# EAGLE board leakio (EAGLE 9.6.2)

Size 160 x 100 mm. Coordinates in mm from the lower left corner, seen from the top.
Outline: 0,0 160,0 160,100 0,100 0,0
Copper layers (1*16): Top 0.035mm / dielectric 1.5mm / Bottom 0.035mm
Design rules "default": minimum track width 6mil, minimum drill 0.35mm, track to track 6mil, track to pad 6mil, pad to pad 6mil, via to via 6mil, smd to smd 6mil, copper to edge 40mil, drill to drill 6mil, minimum pad ring 10mil, minimum via ring 8mil, stop-mask expansion 4mil, vias tented up to drill 0mil, thermal gap 10mil

## Footprints (pad centres in the part's own frame; a part is rotated, then mirrored left to right if it is on the bottom)
0402 = smd 0.85 x 0.9: 1 -0.58,0; 2 0.58,0
0603 = smd 1.1 x 1: 1 -0.85,0; 2 0.85,0
JST-PH-2-SMT-RA = smd 1 x 4.6: 1 1,-3.7; 2 -1,-3.7 | smd 1.6 x 3.4: NC1 -3.4,1.5; NC2 3.4,1.5
JST-PH-2-SMT = smd 1 x 5.5: 1 -1,-1.8; 2 1,-1.8 | smd 1.6 x 3.4: NC1 -3.4,0; NC2 3.4,0
SOT23-5L = smd 0.55 x 1.2: 1 -0.95,-1.3; 2 0,-1.3; 3 0.95,-1.3; 4 0.95,1.3; 5 -0.95,1.3
USB-C-PTH = smd 1 x 0.3: A1 0.81,2.75; A2 0.81,2.25; A3 0.81,1.75; A4 0.81,1.25; A5 0.81,0.75; A6 0.81,0.25; A7 0.81,-0.25; A8 0.81,-0.75; A9 0.81,-1.25; A10 0.81,-1.75; A11 0.81,-2.25; A12 0.81,-2.75 | drill 0.4 pad 0.65: B1 -0.65,-2.8; B2 -1.35,-2.4; B3 -1.35,-1.6; B4 -0.65,-1.2; B5 -1.35,-0.8; B6 -0.65,-0.4; B7 -0.65,0.4; B8 -1.35,0.8; B9 -0.65,1.2; B10 -1.35,1.6; B11 -1.35,2.4; B12 -0.65,2.8 | drill 0.5 pad 0.8 long: P$13 -1.25,4.13; P$14 -1.25,-4.13; P$15 -7.2,4.13; P$16 -7.2,-4.13 | hole 0.65: 0,3.6
SMARTLED-TTW = smd 0.8 x 0.5: A 0,-0.875; C 0,0.875 | smd 0.35 x 0.35: A@1 0,-0.5; C@1 0,0.5
ESP32-WROOM = smd 3 x 0.9: 3V3 0,16.74; EN 0,15.47; GND1 0,18.01; GND3 18,18.01; IO0 18,1.5; IO4 18,2.77; IO5 18,6.58; IO12 0,1.5; IO14 0,2.77; IO16 18,4.04; IO17 18,5.31; IO18 18,7.85; IO19 18,9.12; IO21 18,11.66; IO22 18,15.47; IO23 18,16.74; IO25 0,6.58; IO26 0,5.31; IO27 0,4.04; IO32 0,9.12; IO33 0,7.85; IO34 0,11.66; IO35 0,10.39; NC 18,10.39; RX 18,12.93; SENSOR_VN 0,12.93; SENSOR_VP 0,14.2; TX 18,14.2 | smd 0.9 x 3: CLK 9.635,0; CMD 8.365,0; GND2 3.285,0; IO2 14.715,0; IO13 4.555,0; IO15 13.445,0; SD0 10.905,0; SD1 12.175,0; SD2 5.825,0; SD3 7.095,0 | smd 5 x 5: GND4 8,10.5 | smd 5 x 5 bottom: GND5 8,10.5
TDFN14_3X3MM = smd 0.7 x 0.2: P$1 -1.475,1.2; P$2 -1.475,0.8; P$3 -1.475,0.4; P$4 -1.475,0; P$5 -1.475,-0.4; P$6 -1.475,-0.8; P$7 -1.475,-1.2; P$8 1.475,-1.2; P$9 1.475,-0.8; P$10 1.475,-0.4; P$11 1.475,0; P$12 1.475,0.4; P$13 1.475,0.8; P$14 1.475,1.2 | smd 1.27 x 2.35: P$THERMAL 0,0

## Placement (x,y rotation side)
C1  470nF  [0402]  -38.1,62.23 0 top  (outside the outline)
C2  0.1uF  [0402]  -41.91,62.23 0 top  (outside the outline)
C3  0.1uF  [0402]  -45.72,62.23 0 top  (outside the outline)
C4  2.2uF  [0603]  -38.1,45.72 0 top  (outside the outline)
C5  10uF  [0603]  -46.99,53.34 0 top  (outside the outline)
C6  10uF  [0603]  -50.8,53.34 0 top  (outside the outline)
CN1  [JST-PH-2-SMT-RA]  12.7,20.32 0 top
CN2  [JST-PH-2-SMT]  12.7,3.81 0 top
CN3  [JST-PH-2-SMT]  -57.15,6.35 0 top  (outside the outline)
IC1  MCP73831/OT  [SOT23-5L]  -13.97,49.53 0 top  (outside the outline)
J1  [USB-C-PTH]  11.43,85.09 90 top
LED1  [SMARTLED-TTW]  -22.86,53.34 0 top  (outside the outline)
LED2  [SMARTLED-TTW]  -21.59,46.99 0 top  (outside the outline)
R1  2.2k  [0603]  5.08,68.58 0 top
R2  100K  [0402]  -48.26,62.23 0 top  (outside the outline)
R3  150k  [0603]  5.08,64.77 0 top
R4  10k  [0603]  -22.86,62.23 0 top  (outside the outline)
R5  2.5k  [0603]  -26.67,62.23 0 top  (outside the outline)
R6  470  [0603]  -30.48,62.23 0 top  (outside the outline)
R7  470  [0603]  -34.29,62.23 0 top  (outside the outline)
U$1  ESP32-WROOM  [ESP32-WROOM]  21.59,10.16 0 top
U$2  MAX9814TDFN14  [TDFN14_3X3MM]  13.97,43.18 0 top

## Library data of the parts
C1 = SparkFun-Capacitors; PROD_ID: CAP-09041
C2 C3 = SparkFun-Capacitors; PROD_ID: CAP-12416
C4 = SparkFun-Capacitors; PROD_ID: CAP-07888
C5 C6 = SparkFun-Capacitors; PROD_ID: CAP-11015
CN1-CN3 IC1 LED1 LED2 U$2 = adafruit
J1 = Connectors
R1 = SparkFun-Resistors; PROD_ID: RES-08272
R2 = SparkFun-Resistors; PROD_ID: RES-13495
R3 = SparkFun-Resistors; PROD_ID: RES-09117
R4-R7 = SparkFun-Resistors; PROD_ID: RES-00824
U$1 = ESP32

## Nets
+5V: C6.1 CN1.2 IC1.2 R4.2 R5.2 U$1.EN U$2.P$2 U$2.P$5
GND: C1.2 C3.1 C4.1 C5.2 C6.2 CN3.1 J1.A12 J1.B1 LED2.C@1 R2.1 U$1.GND1 U$2.P$4 U$2.P$7 U$2.P$11 U$2.P$THERMAL
N$1: C3.2 U$2.P$1
N$2: C4.2 U$2.P$3
N$3: C5.1 IC1.4 J1.A9 LED1.A@1
N$4: U$1.SENSOR_VP U$2.P$6
N$5: C2.1 U$2.P$8
N$6: C2.2 CN3.2 R1.1
N$7: C1.1 U$2.P$12
N$8: LED2.A@1 R7.1
N$9: R1.2 R3.1 U$2.P$13
N$10: R2.2 R3.2 U$2.P$14
N$11: IC1.5 R4.1 R5.1
N$12: LED1.C@1 R6.1
N$13: CN2.1 U$1.IO2
N$14: CN1.1
N$15: CN2.2 U$1.GND2
N$16: IC1.1 R6.2 R7.2

## Tracks (layer width: path | path; a pad name or v marks a point on that pad's centre or on a via)
+5V  (7 unrouted)
GND  (14 unrouted)
N$1  (1 unrouted)
N$2  (1 unrouted)
N$3  (3 unrouted)
N$4  (1 unrouted)
N$5  (1 unrouted)
N$6  (2 unrouted)
N$7  (1 unrouted)
N$8  (1 unrouted)
N$9  (2 unrouted)
N$10  (2 unrouted)
N$11  (2 unrouted)
N$12  (1 unrouted)
N$13  (1 unrouted)
N$15  (1 unrouted)
N$16  (2 unrouted)